# Altium PCB 电剪_V1.0.PcbDoc
Units mm, origin at the board's own origin, x right, y up, seen from the top; angles counter-clockwise.
Board outline 95.8 x 25.7 mm, 2 copper layers (Top Layer, Bottom Layer); 52 components, 35 nets, 151 pads, 75 vias.
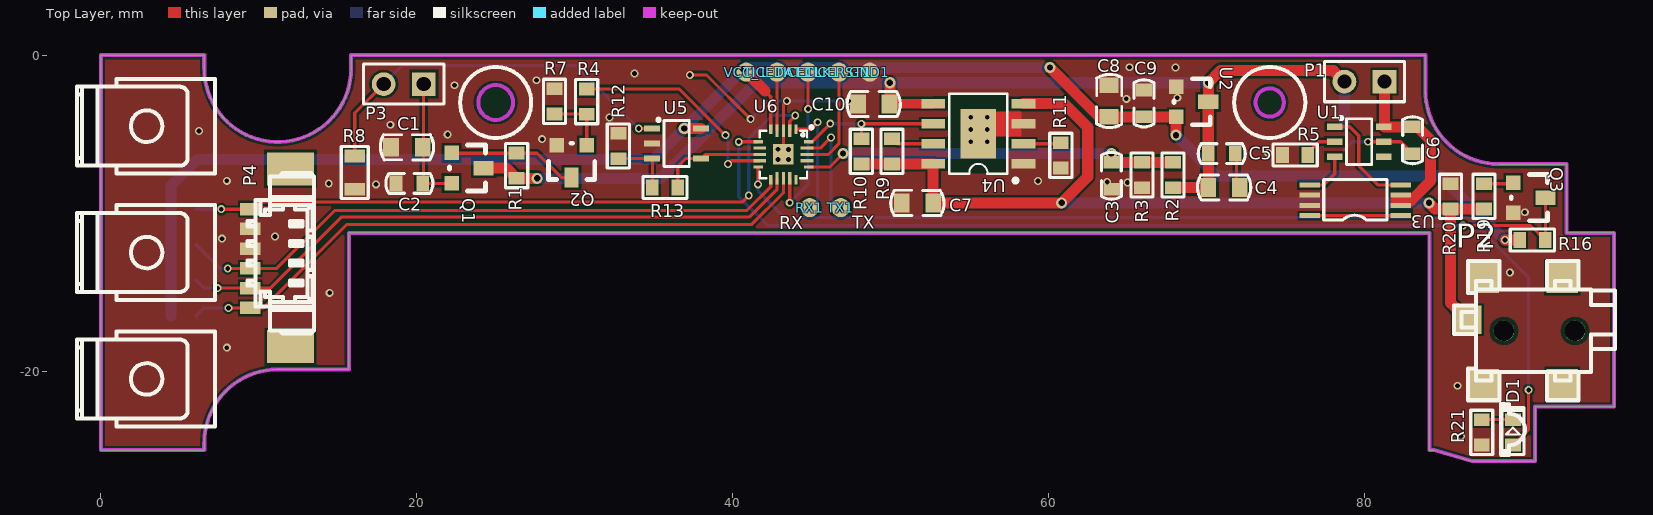
[diagram p0: Top Layer view]
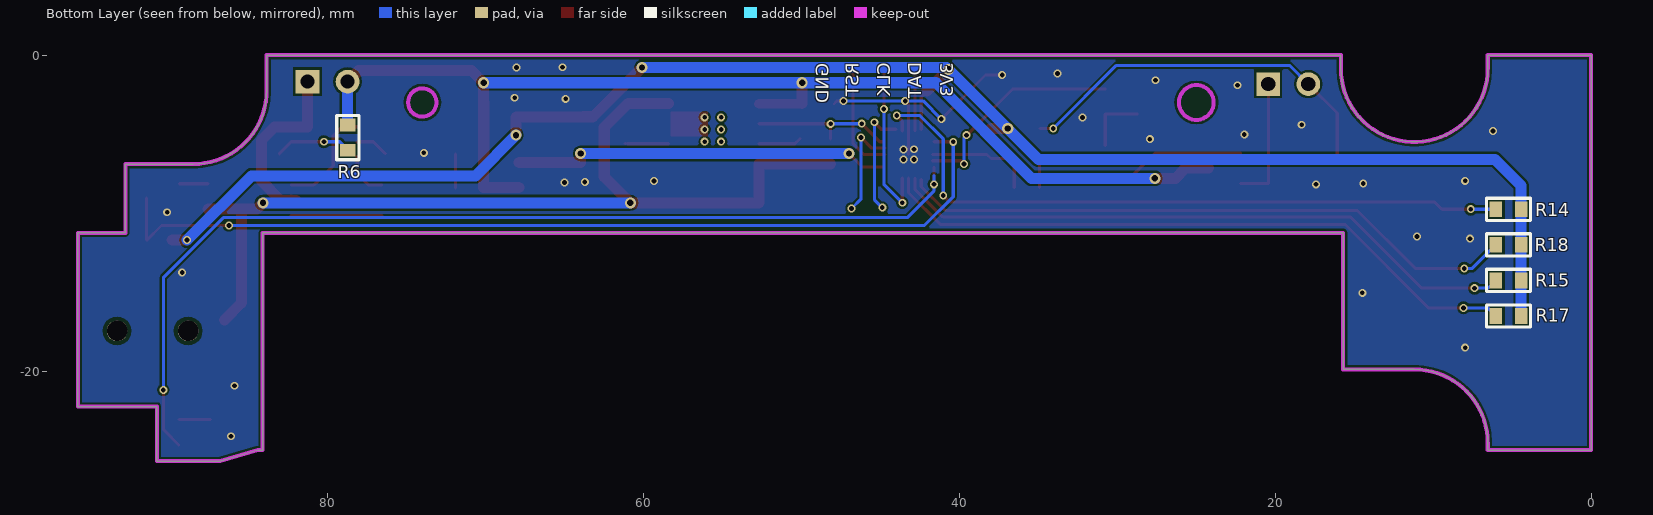
[diagram p1: Bottom Layer view, seen from below]

## Layer stack, top to bottom
Top Layer: signal copper 0.0356
Dielectric: dielectric 0.32, FR-4, Dk 4.8
Bottom Layer: signal copper 0.0356

## Board outline
0,-25 6.55,-25 6.55,-24.55 cw(c11.2,-24.55) 11.2,-19.9 15.7,-19.9 15.7,-11.25 84.1,-11.25 84.1,-25 84.4,-25 86.8,-25.7 90.8,-25.7 90.8,-22.25 95.8,-22.25 95.8,-11.25 92.8,-11.25 92.8,-6.9 88.5,-6.9 cw(c88.5,-2.25) 83.85,-2.25 83.85,0 15.85,0 15.85,-0.85 cw(c11.2,-0.85) 6.55,-0.85 6.55,0 0,0

## Design rules (kind name [scope] priority, off if disabled: settings)
Clearance [All] p1: gap=0.15
FabricationTestPointUsage TestPointUsage [All] p1: valid=0 allowmultiple=FALSE
FabricationTestpoint Testpoint [(IsPad And (OnTopLayer Or OnBottomLayer))] p1: side=3 testpointundercomponent=TRUE minsize=1.016 maxsize=2.54 preferedsize=1.524 minholesize=0 maxholesize=1.016 preferedholesize=0.813 testpointgrid=0.025 allowsidetop=TRUE allowsidebottom=TRUE usegrid=TRUE gridtolerance=0
PlaneConnect [All] p1: planeconnectstyle=Direct reliefexpansion=0.508 reliefentries=4 reliefconductorwidth=0.254 reliefairgap=0.254
PolygonConnect [All] p1: connectstyle=Direct reliefconductorwidth=0.254 reliefentries=4 polygonreliefangle="90 Angle"
RoutingVias [All] p1: holewidth=0.3 width=0.5 viastyle="Through Hole" minholewidth=0.3 minwidth=0.5 maxholewidth=0.711 maxwidth=1.27
SilkscreenOverComponentPads [All] p1: minsilkscreentomaskgap=0.254
SolderMaskExpansion [All] p1: expansion=0.102
Width [All] p1: maxlimit=1 minlimit=0.15 preferedwidth=0.254
24 further rules are at their usual default settings.

## Components (designator, comment, footprint, x,y, rotation, side; value= is the part's Value field where it differs from the comment)
C1 "22uF" C-0805 19.381,-5.834 r0 top
C2 "1uF" C-0603 19.535,-8.118 r0 top
C3 "1uF" C-0603 63.974,-7.64 r270 top
C4 "22uF" C-0805 71.107,-8.386 r0 top
C5 "1uF" C-0603 70.961,-6.241 r0 top
C6 "0.1uF" C-0603 83.044,-5.391 r90 top
C7 "10uF" C-0805 51.699,-9.355 r180 top
C8 "22uF" C-0805 63.838,-2.903 r270 top
C9 "1uF" C-0603 66.035,-3.056 r270 top
C10 "10uF" C-0805 48.933,-3.094 r180 top
D1 "LED0" LED-0603 90.076,-22.517 r270 top
GND1 "TP" TP-1.2 48.683,-1.08 r90 top
P1 "18650" HDR1X2 81.267,-1.679 r180 top
P2 "TDC-065D" TDC-065D 94.32,-20.861 r180 top
P3 "Header 2" HDR1X2 20.45,-1.836 r180 top
P4 "Molex 53398" "Molex 53398" 9.456,-16.005 r90 top
Q1 "BM2301" SOT-23 22.967,-7.148 r270 top
Q2 "8050" SOT-23 29.81,-6.474 r180 top
Q3 "8050" SOT-23 90.181,-9.026 r270 top
R1 "470K" R-0603 26.325,-7 r270 top
R2 "1M" R-0603 67.88,-7.59 r90 top
R3 "1M" R-0603 65.912,-7.59 r90 top
R4 "4.7K" R-0603 30.761,-2.945 r270 top
R5 "1K" R-0603 75.606,-6.327 r180 top
R6 "100R" R-0603 78.712,-5.225 r270 bottom
R7 "10K" R-0603 28.716,-2.925 r270 top
R8 "0.03R" R-0805 16.078,-8.489 r90 top
R9 "10K" R-0603 50.084,-6.092 r270 top
R10 "10K" R-0603 48.149,-6.092 r270 top
R11 "1.2K" R-0603 60.772,-6.345 r90 top
R12 "2K" R-0603 32.765,-5.758 r90 top
R13 "120K" R-0603 35.719,-8.377 r180 top
R14 "100K" R-0603 5.239,-9.761 r0 bottom
R15 "100K" R-0603 5.239,-16.51 r0 bottom
R16 "10K" R-0603 90.629,-11.712 r180 top
R17 "100K" R-0603 5.239,-14.26 r0 bottom
R18 "100K" R-0603 5.239,-12.01 r0 bottom
R19 "1K" R-0603 87.56,-8.945 r90 top
R20 "10K" R-0603 85.437,-8.945 r90 top
R21 "2K" R-0603 87.422,-23.879 r90 top
RX1 "TP" TP-1.2 44.875,-9.655 r0 top
TICECLK1 "TP" TP-1.2 44.768,-1.08 r90 top
TICEDAT1 "TP" TP-1.2 42.81,-1.08 r90 top
TICERST1 "TP" TP-1.2 46.725,-1.08 r90 top
TX1 "TP" TP-1.2 46.846,-9.655 r0 top
U1 "DW01" SOT-23-6L 79.661,-5.483 r270 top
U2 "PT5110E SOT23" SOT-23 68.838,-2.953 r270 top
U3 "8205A" TSSOP-8 79.421,-9.189 r90 top
U4 "TP4056 SOP8" ESOP8 55.55,-4.98 r90 top
U5 "LM321" SOT-23-5 36.449,-5.596 r270 top
U6 "N76E003AQ20" "QFN-20 0.4mm" 43.21,-6.29 r0 top
VCC_1 "TP" TP-1.2 40.852,-1.08 r90 top

## Footprints (in the part's own frame and the unit in brackets; to place one, negate y for a bottom-side part, rotate by r counter-clockwise, add the part's x,y. Pads: shape width x height; smd on the part's side, far side on the other; paste and mask are expansions set on the pad)
C-0603 [mm]
  rect 0.8x1 smd: 1(-0.85,0) 2(0.85,0)
  silkscreen extent -1.49,-0.63 1.49,0.63
C-0805 [mm]
  rect 1x1.2 smd: 1(-1,0) 2(1,0)
  silkscreen extent -1.68,-0.8 1.69,0.8
ESOP8 [mil]
  rect 24x59.06 smd: 1(-75,-112.5) 2(-25,-112.5) 3(25,-112.5) 4(75,-112.5) 5(75,112.5) 6(25,112.5) 7(-25,112.5) 8(-75,112.5)
  rect 124.02x88.98 smd: ""(0,0)
  silkscreen extent -121,-98 100,72
HDR1X2 [mm] "Connector; Header; 2 Position"
  rect 1.5x1.5 hole 0.9: 1(0,0)
  round 1.5 hole 0.9: 2(2.54,0)
  silkscreen extent -1.27,-1.27 3.81,1.27
LED-0603 [mm]
  rect 0.8x1 smd: 1(2.17,-0.68) 2(0.57,-0.68)
  silkscreen extent -0.19,-1.38 2.77,0.02
"Molex 53398" [mm]
  rect 0.8x1.3 smd: 1(0,0) 2(1.25,0) 3(2.5,0) 4(3.75,0) 5(5,0) 6(6.25,0)
  rect 2.1x3 smd: ""(-2.45,-2.55) ""(8.8,-2.55)
"QFN-20 0.4mm" [mm]
  rect 0.2x0.6 smd: 1(0.8,1.6) 5(-0.8,1.6) 11(-0.8,-1.6) 15(0.8,-1.6)
  rect 0.2x0.8 smd: 2(0.4,1.5) 3(0,1.5) 4(-0.4,1.5) 12(-0.4,-1.5) 13(0,-1.5) 14(0.4,-1.5)
  rect 0.6x0.2 smd: 6(-1.6,0.8) 10(-1.6,-0.8) 16(1.6,-0.8) 20(1.6,0.8)
  rect 0.8x0.2 smd: 7(-1.5,0.4) 8(-1.5,0) 9(-1.5,-0.4) 17(1.5,-0.4) 18(1.5,0) 19(1.5,0.4)
  rect 1.3x1.3 smd: 21(0,0)
  silkscreen extent -1.5,-1.5 1.88,1.82
R-0603 [mm]
  rect 0.8x1 smd: 1(-0.8,0) 2(0.8,0)
  silkscreen extent -1.4,-0.7 1.4,0.7
R-0805 [mm]
  rect 0.8x1.3 smd: 1(0,0) 2(2.1,0)
  silkscreen extent -0.6,-0.85 2.7,0.86
SOT-23 [mil]
  rect 36x36 smd: 1(-37.48,-30.03) 2(37.52,-30.03)
  rect 36x50 smd: 3(0.52,49.97)
  silkscreen extent -57,-35 58,55
SOT-23-5 [mm]
  rect 0.4x1 smd: 1(-0.95,-1.55) 2(0,-1.55) 3(0.95,-1.55) 4(0.95,1.55) 5(-0.95,1.55)
  silkscreen extent -1.6,-1.24 1.45,0.8
SOT-23-6L [mm]
  rect 0.4x1 smd: 1(-0.95,-1.55) 2(0,-1.55) 3(0.95,-1.55) 4(0.95,1.55) 5(0,1.55) 6(-0.95,1.55)
  silkscreen extent -1.6,-1.24 1.45,0.8
TDC-065D [mm]
  rect 1.8x1.8 smd: 1(7.8,-4.1)
  rect 2x2 smd: 2(6.8,0) 3(6.8,-6.8) ""(1.8,0) ""(1.8,-6.8)
  round 1.3 hole 1.3: S(1,-3.4) S(5.5,-3.4)
TP-1.2 [mm]
  round 1.2 smd: 1(0,0)
TSSOP-8 [mm]
  rect 0.32x1.3 smd: 1(-0.975,-2.875) 2(-0.325,-2.875) 3(0.325,-2.875) 4(0.975,-2.875) 5(0.975,2.875) 6(0.325,2.875) 7(-0.325,2.875) 8(-0.975,2.875)
  silkscreen extent -1.26,-2 1.31,2

## Part data
C1 C2 C3 C4 C5 C6 C7 C8 C9 C10: library part Cap, "Capacitor"
D1: "Typical INFRARED GaAs LED"
P1: library part "Header 2", "Header, 2-Pin"
P3: "Header, 2-Pin"
P4: library part "Header 6H", "Header, 6-Pin, Right Angle"
Q1: library part PMOS-2, "P-Channel Power MOSFET"
Q2 Q3: library part NPN, "NPN Bipolar Transistor"
R1 R2 R3 R4 R5 R6 R7 R9 R10 R11 R12 R13 R14 R15 R16 R17 R18 R19 R20 R21: library part Res1, "Resistor"
R8: library part Res1

## Via types
v1: diameter 0.5, hole 0.3, Top Layer to Bottom Layer, 60 vias
v2: diameter 0.7, hole 0.4, Top Layer to Bottom Layer, 11 vias
v3: diameter 0.5, hole 0.3, Top Layer to Bottom Layer, tented both sides, 4 vias

## Nets (pads, with @x,y where several pads share a name; then routed paths per layer and width w, separated by ;. In a path a pad name is that pad's centre, name@x,y a point inside that pad or via, vN(x,y) a via of type N, cw(c..) or ccw(c..) an arc to the next point about the centre after c; other vN are vias at no path point)
5V: C7.1 P2.1 R9.2 R10.2 R19.1 R20.1 U4.4 U4.8 | length 59.7
  Top Layer w0.7: R10.2 48.155,-6.885 U4.8 C7.1@52.693,-9.348 ; C7.1 v2(60.825,-9.355) 62.48,-7.7 62.48,-4.58 60.975,-3.075 U4.4 ; v2(84.085,-9.355) 84.475,-9.745 R20.1 ; P2.1 85.437,-15.678 R20.1 ; R19.1 R20.1
  Bottom Layer w0.7: v2(60.825,-9.355) v2(84.085,-9.355)
BAT+: C4.1 C5.1 C10.1 P1.2 Q1.3 R1.2 R2.1 R6.1 U2.3 U4.5 | length 73.5
  Top Layer w0.6: C10.1@49.952,-3.075 U4.5
  Top Layer w0.7: Q1.3 25.685,-7.161 R1.2 v2(27.62,-7.8) ; C10.1@49.95,-3.077 v2(49.95,-1.75) ; R2.1@67.884,-8.386 C4.1 ; C5.1@70.108,-6.238 U2.3 70.11,-2.964 v2(70.11,-1.75) 70.89,-0.97 78.018,-0.97 P1.2 ; C4.1@70.111,-8.383 C5.1
  Bottom Layer w0.7: v2(27.62,-7.8) 35.43,-7.8 41.48,-1.75 v2(49.95,-1.75) v2(70.11,-1.75) ; R6.1@78.727,-4.41 P1.2
BAT-: C6.2 P1.1 U1.6 U3.2 U3.3 | length 11.7
  Top Layer w0.5: 82.296,-9.31 82.296,-9.22 82.296,-9.08
  Top Layer w0.7: P1.1 81.267,-4.541 83.341,-4.541 84.148,-5.348 84.148,-5.364 84.19,-5.406 84.19,-7.98 82.95,-9.22 82.296,-9.22 81.99,-9.22
BAT_ADC: C3.1 R2.2 R3.2 U6.16 | length 24
  Top Layer w0.2: U6.16 46.13,-7.09 v2(46.99,-6.23)
  Top Layer w0.7: C3.1@63.97,-6.786 v2(63.97,-6.23) ; C3.1 R2.2
  Bottom Layer w0.7: v2(46.99,-6.23) v2(63.97,-6.23)
CHARGING_CK: R10.1 U4.6 U6.20 | length 9.3
  Top Layer w0.2: U6.20 45.03,-5.49 v1(46.18,-4.34) ; R10.1 v1(48.149,-4.35) ; v1@48.154,-4.345 U4.6
  Bottom Layer w0.2: v1@46.18,-4.35 v1(48.149,-4.35)
GND: C1.1 C2.1 C3.2 C7.2 C8.1 C9.1 C10.2 GND1.1 P2.2 P2.3 P4.4 P4.5 Q2.2 Q3.2 R3.1 R5.2 R7.1 R8.1 R11.1 R12.2 R20.2 R21.1 U2.1 U3.6 U3.7 U4. U4.1 U4.3 U5.2 U6.3 U6.21 | length 17.3
  Top Layer w0.2: v1(37.29,-1.26) 38.347,-1.26 v1(41.139,-4.052) ; U6.21 U6.3 43.21,-3.12 v1(43.43,-2.9) ; v1(47.34,-2.9) 47.739,-2.9 C10.2
  Bottom Layer w0.2: 42.139,-3.052 v1(41.139,-4.052) 42.291,-2.9 v1(43.43,-2.9) v1(47.34,-2.9)
  other v1: 86.11,-24.13 85.89,-20.93 7.98,-18.52 14.49,-15.05 89.2,-13.77 7.67,-11.62 11.03,-11.48 90.15,-9.95 17.42,-8.18 14.43,-8.13 65,-8.07 63.71,-8.04 7.98,-7.96 59.33,-7.97 73.9,-6.19 55.08,-5.48 56.12,-5.48 27.94,-5.32 21.96,-5.02 6.21,-4.8 55.08,-4.71 56.12,-4.71 18.33,-4.41 32.2,-3.95 55.08,-3.94 56.12,-3.94 64.92,-2.77 68.15,-2.7 22.39,-1.91 27.58,-1.59 33.78,-1.16 68.03,-0.79 65.12,-0.77
  other v3: 42.869,-6.612 43.539,-6.612 43.539,-5.972 42.869,-5.962
KEY: P4.6 R14.2 U6.2 | length 43.6
  Top Layer w0.2: v1(7.625,-9.755) P4.6 9.901,-9.31 40.601,-9.31 v1(41.019,-8.892) ; U6.2 43.61,-4.18 v1(43.96,-3.83)
  Bottom Layer w0.2: R14.2 v1@7.619,-9.761 ; v1(41.019,-8.892) 41.019,-5.302 42.489,-3.832 ; 42.491,-3.83 v1(43.96,-3.83)
LED1: D1.1 U6.10 | length 65.4
  Top Layer w0.2: v1(41.61,-8.181) U6.10 ; 90.28,-23.803 D1.1 90.39,-23.693 v1(90.39,-21.2)
  Bottom Layer w0.2: 41.611,-7.639 41.611,-8.611 43.29,-10.29 86.59,-10.29 90.39,-14.09 v1(90.39,-21.2)
MOTOR+: C1.2 C2.2 P3.1 Q1.2 | length 8.1
  Top Layer w0.2: P3.1 20.435,-1.851 20.435,-8.118 Q1.2@22.204,-8.118
MOTOR-: P3.2 R8.2 U5.1 | length 24.4
  Top Layer w0.2: R8.2 16.078,-3.668 P3.2 ; v1(34.056,-4.646) U5.1
  Bottom Layer w0.2: P3.2 19.096,-0.65 30.06,-0.65 v1(34.056,-4.646)
MOTOR_EN: R4.1 U6.9 | length 15.6
  Top Layer w0.2: R4.1 36.615,-2.145 v1(39.54,-5.07) ; v1(39.699,-6.892) 39.901,-6.69 U6.9 40.071,-6.69
  Bottom Layer w0.2: v1(39.54,-5.07) 39.699,-5.229 v1(39.699,-6.892)
NetC4_2: C4.2 C5.2 | length 2.1
  Top Layer w0.2: C4.2@71.901,-8.4 C5.2@71.901,-6.251
NetC6_1: C6.1 R6.2 U1.5 | length 4.9
  Top Layer w0.2: v1(80.223,-5.483) U1.5 82.285,-5.483 C6.1
  Bottom Layer w0.2: R6.2@78.66,-6.049 78.698,-6.011 79.226,-5.483 v1(80.223,-5.483)
NetD1_2: D1.2 R21.2 | length 2
  Top Layer w0.2: R21.2 D1.2@89.387,-23.079
NetQ1_1: Q1.1 Q2.3 R1.1 | length 8.2
  Top Layer w0.2: Q1.1@22.204,-6.211 27.611,-6.211 29.143,-7.743 Q2.3
NetQ2_1: Q2.1 R4.2 R7.2 | length 4
  Top Layer w0.2: R7.2 30.74,-3.725 30.762,-3.746 Q2.1
NetQ3_1: Q3.1 R19.2 | length 1.8
  Top Layer w0.2: R19.2 Q3.1@89.348,-8.145
NetR5_1: R5.1 U1.2 | length 2.1
  Top Layer w0.2: R5.1@76.336,-6.237 77.09,-5.483 U1.2
NetR9_1: R9.1 U4.7 | length 2.7
  Top Layer w0.2: R9.1 50.407,-5.615 U4.7
NetR11_2: R11.2 U4.2 | length 2.6
  Top Layer w0.2: U4.2 R11.2@61.003,-5.615 ; R11.2@61.144,-5.595 R11.2@61.15,-5.589
NetR12_1: R12.1 R13.2 U5.3 | length 3.9
  Top Layer w0.2: R12.1@32.777,-6.546 U5.3 ; R13.2 U5.3@34.919,-6.566
NetU3_1: U3.1 U3.8 | length 5.8
  Top Layer w0.2: U3.8 U3.1
OC: U1.3 U3.5 | length 2.9
  Top Layer w0.2: U3.5 77.416,-8.214 78.111,-7.519 U1.3
OD: U1.1 U3.4 | length 6.8
  Top Layer w0.2: U1.1 79.063,-4.533 79.63,-5.1 79.63,-7 80.844,-8.214 U3.4
RX: RX1.1 U6.1 | length 7.2
  Top Layer w0.2: U6.1 44.94,-4.69 v1(45.38,-4.25)
  Bottom Layer w0.2: v1(44.875,-9.655) 45.38,-9.15 v1(45.38,-4.25)
SW_AUTO: P4.1 R15.2 U6.13 | length 41.3
  Top Layer w0.2: v1(8.085,-16.005) P4.1 10.305,-16.005 15.59,-10.72 41.22,-10.72 43.211,-8.729 U6.13
  Bottom Layer w0.2: R15.2 6.544,-16.005 v1(8.085,-16.005)
SW_OFF: P4.3 R18.2 U6.11 | length 39.6
  Top Layer w0.2: v1(8.035,-13.505) P4.3 11.135,-13.505 14.8,-9.84 40.9,-9.84 42.411,-8.329 ; 42.41,-8.341 U6.11
  Bottom Layer w0.2: R18.2 7.533,-13.505 v1(8.035,-13.505)
SW_ON: P4.2 R17.2 U6.12 | length 40.3
  Top Layer w0.2: v1(7.385,-14.755) P4.2 10.725,-14.755 15.22,-10.26 41.04,-10.26 42.811,-8.489 ; 42.81,-8.489 U6.12
  Bottom Layer w0.2: R17.2 6.534,-14.755 v1(7.385,-14.755)
TICECLK: TICECLK1.1 U6.14 | length 11.2
  Top Layer w0.2: v1(43.611,-9.35) U6.14@43.611,-7.79 ; v1(44.78,-3.42) TICECLK1.1@44.78,-1.092
  Bottom Layer w0.2: 44.22,-8.741 v1(43.611,-9.35) 44.78,-8.181 v1(44.78,-3.42)
TICEDAT: TICEDAT1.1 U6.4 | length 3.7
  Top Layer w0.2: TICEDAT1.1 42.811,-1.081 U6.4@42.811,-4.79
TICERST: TICERST1.1 U6.18 | length 6.8
  Top Layer w0.2: U6.18 46.056,-6.29 46.725,-5.621 TICERST1.1
TX: TX1.1 U6.19 | length 6.6
  Top Layer w0.2: U6.19 45.55,-5.89 v1(46.22,-5.22) v1@46.27,-5.22
  Bottom Layer w0.2: v1(46.22,-5.22) 46.22,-9.1 v1(46.83,-9.71)
USB_CHECK: Q3.3 R16.1 U6.6 | length 59.5
  Top Layer w0.2: v1(40.387,-5.49) U6.6 ; v1(86.24,-10.79) 90.507,-10.79 R16.1 ; R16.1@91.45,-11.691 Q3.3
  Bottom Layer w0.2: v1(40.387,-5.49) 40.388,-8.968 42.21,-10.79 v1(86.24,-10.79)
V_MOTOR: R13.1 U5.4 U6.8 | length 6.8
  Top Layer w0.2: R13.1 36.519,-7.061 37.034,-6.546 U5.4 38.255,-6.29 U6.8
VCC_33V: C8.2 C9.2 R14.1 R15.1 R16.2 R17.1 R18.1 U2.2 U5.5 U6.5 VCC_1.1 | length 107.5
  Top Layer w0.2: 42.051,-2.279 42.41,-2.637 U6.5
  Top Layer w0.7: v2(36.936,-4.646) U5.5 ; v2(40.676,-0.904) VCC_1.1 42.051,-2.279 ; v2@60.075,-0.795 63.183,-3.903 C8.2 ; C8.2@63.84,-3.906 U2.2 ; v2(68.07,-5.07) U2.2@68.07,-3.912 ; v1(88.892,-11.712) R16.2
  Bottom Layer w0.7: R15.1 R17.1 R18.1 R14.1 4.439,-8.261 6.1,-6.6 34.98,-6.6 v2(40.676,-0.904) 40.8,-0.78 v2(60.09,-0.78) ; v2(68.07,-5.07) 70.64,-7.64 84.82,-7.64 v1(88.892,-11.712)
pads on no net: P2. P2.S P4. U1.4 U6.7 U6.15 U6.17

## Polygon pours and split planes (outlines as drawn)
GND on Bottom Layer "GND" (solid, remove dead copper, pour order 1000): 0,0 95.8,0 95.8,-25.7 0,-25.7 0,0
GND on Top Layer "GND" (solid, remove dead copper, pour order 1000): 0,0 95.8,0 95.8,-25.7 0,-25.7 0,0

## Keep-outs
Keep-Out Layer:
  circle w0.254: c73.998,-3 r0.9
  circle w0.254: c24.998,-3 r1.1
  lines w0.254: 0,-10 0,-7 ; 0,-25 6.55,-25 6.55,-24.55 cw(c11.2,-24.55) 11.2,-19.9 15.7,-19.9 15.7,-11.25 84.1,-11.25 84.1,-25 84.4,-25 86.8,-25.7 90.8,-25.7 90.8,-22.25 95.8,-22.25 95.8,-11.25 92.8,-11.25 92.8,-6.9 88.5,-6.9 cw(c88.5,-2.25) 83.85,-2.25 83.85,0 15.85,0 15.85,-0.85 cw(c11.2,-0.85) 6.55,-0.85 6.55,0 0,0 0,-25

## Other copper
Top Layer:
  rectangle net GND: 55.92,-5.14 58.27,-3.58
  pour cut-out: 41.71,-4.79 44.71,-4.79 44.71,-7.79 41.71,-7.79
  pour cut-out: 53.709,-2.44 57.392,-2.44 57.392,-7.52 53.709,-7.52

## Silkscreen, mask and mechanical layers (free items; w line width, h text height)
Top Overlay:
  drawing of 204 lines, arcs and shapes, not listed
  text "TX" at 47.57,-10.98 h0.8
  text "RX" at 42.95,-11.01 h0.8
Bottom Overlay:
  text "DAT" at 42.401,-0.46 h0.8 r270
  text "3V3" at 40.4,-0.48 h0.8 r270
  text "CLK" at 44.37,-0.48 h0.8 r270
  text "RST" at 46.371,-0.5 h0.8 r270
  text "GND" at 48.271,-0.51 h0.8 r270

## Dimensions
0,0 to 95.8,-22.25 on Keep-Out Layer
83.85,0 to 90.8,-25.7 on Keep-Out Layer